# Altium PCB 180220.PcbDoc
Units mm, origin at the board's own origin, x right, y up, seen from the top; angles counter-clockwise.
Board outline 25.4 x 26.67 mm, 2 copper layers (Top Layer, Bottom Layer); 7 components, 5 nets, 18 pads, 0 vias.
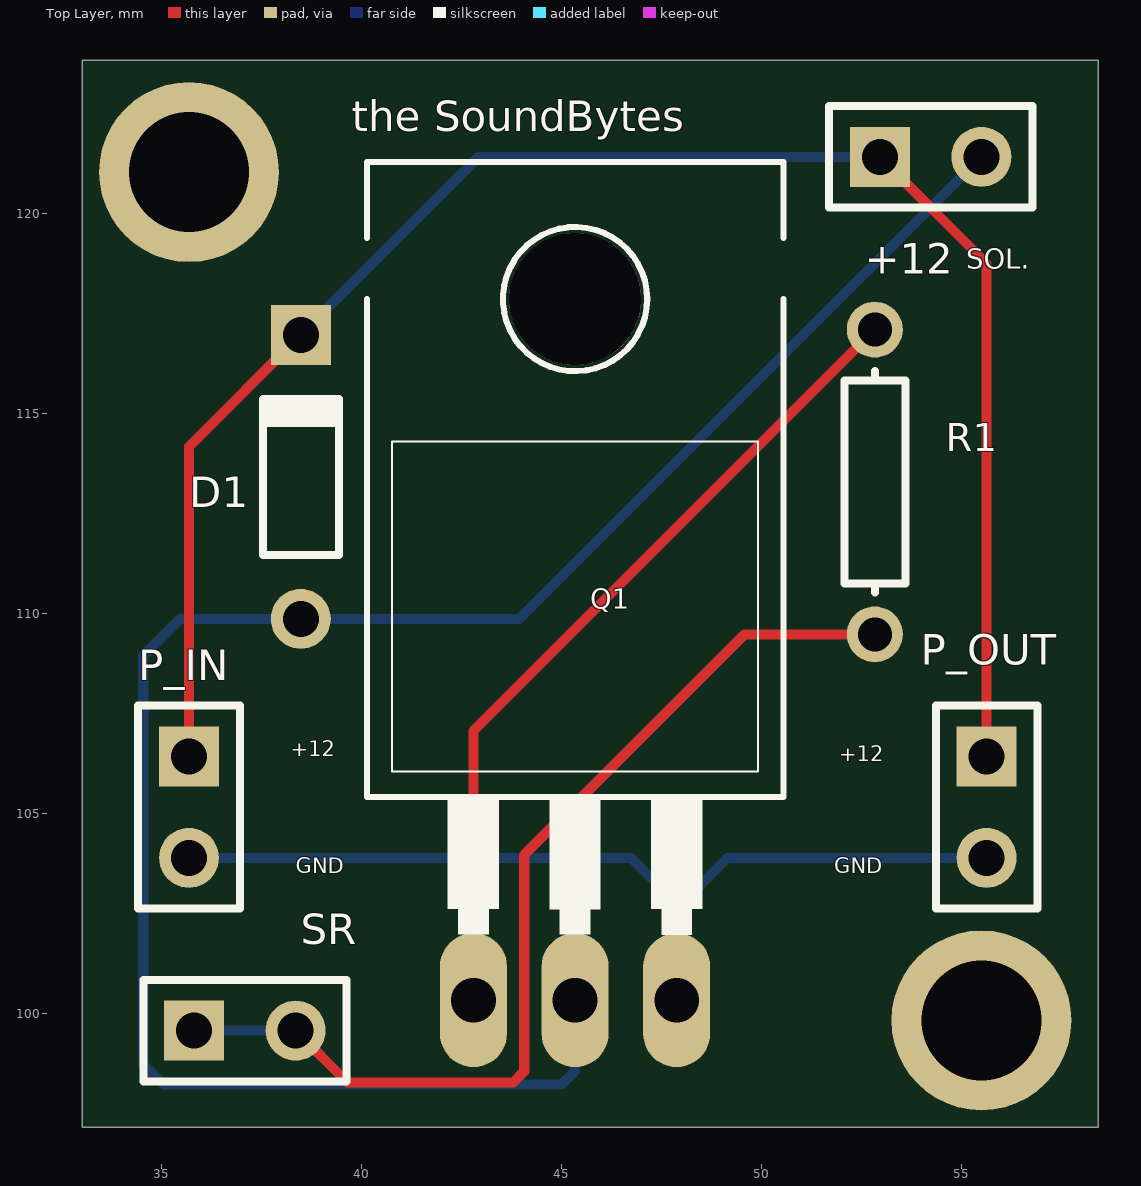
[diagram p0: Top Layer view]
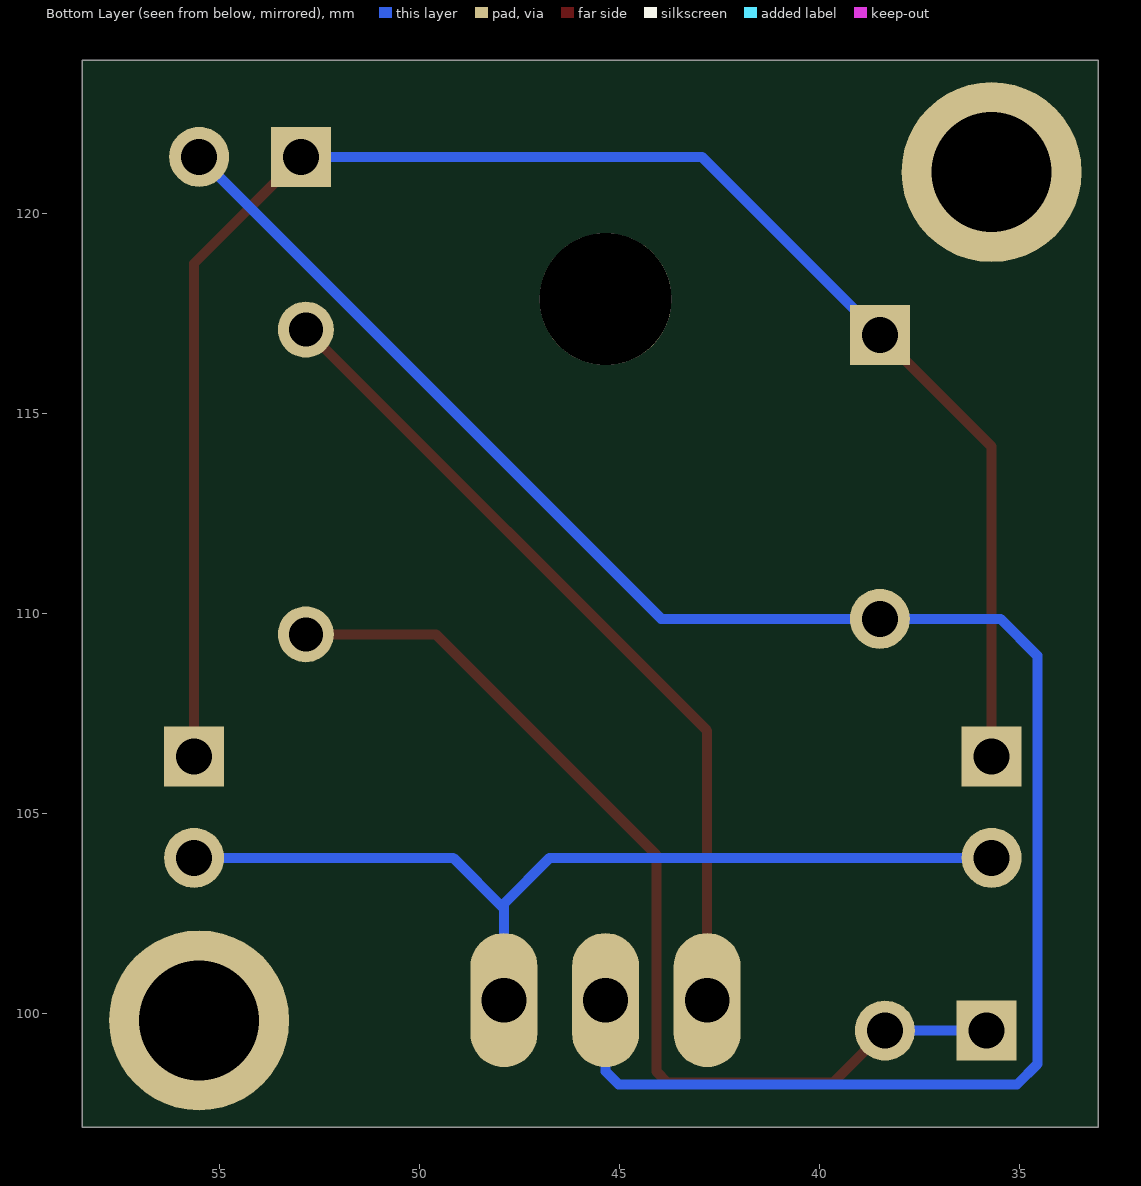
[diagram p1: Bottom Layer view, seen from below]

## Layer stack, top to bottom
Top Solder: solder mask 0.0102, Solder Resist, Dk 3.5
Top Layer: signal copper 0.0356
Dielectric 1: dielectric 0.32, FR-4, Dk 4.8
Bottom Layer: signal copper 0.0356
Bottom Solder: solder mask 0.0102, Solder Resist, Dk 3.5

## Board outline
33.02,123.825 58.42,123.825 58.42,97.155 33.02,97.155

## Design rules (kind name [scope] priority, off if disabled: settings)
Clearance [All] p1: gap=0.254
PolygonConnect [All] p1: connectstyle=Relief reliefconductorwidth=0.254 reliefentries=4 polygonreliefangle="90 Angle" airgapwidth=0.254
RoutingVias [All] p1: holewidth=0.711 width=1.27 viastyle="Through Hole" minholewidth=0.711 minwidth=1.27 maxholewidth=0.711 maxwidth=1.27
SolderMaskExpansion [All] p1: expansion=0.102
Width [All] p1: maxlimit=0.254 minlimit=0.254 preferedwidth=0.254
30 further rules are at their usual default settings.

## Components (designator, comment, footprint, x,y, rotation, side; value= is the part's Value field where it differs from the comment)
D1 "Diode 1N914" DO-35 38.481,113.411 r90 top
P_IN "P_IN" HDR1X2 35.687,106.426 r270 top (schematic designator P2)
P_OUT "P_OUT" HDR1X2 55.626,106.426 r270 top (schematic designator P4)
Q1 "TIP120" TO220AH_TIP120(Primary) 45.339,106.68 r0 top
R1 "Res1" AXIAL-0.3 52.832,113.284 r90 top
SOL. "Solenoid" HDR1X2 52.959,121.412 r0 top (schematic designator P1)
SR "SR" HDR1X2 35.814,99.568 r0 top (schematic designator P3)

## Footprints (in the part's own frame and the unit in brackets; to place one, negate y for a bottom-side part, rotate by r counter-clockwise, add the part's x,y. Pads: shape width x height; smd on the part's side, far side on the other; paste and mask are expansions set on the pad)
AXIAL-0.3 [mm] "Axial Device, Thru-Hole; 2 Leads; 0.3 in Pin Spacing"
  round 1.4 hole 0.85: 1(-3.81,0) 2(3.81,0)
  silkscreen extent -2.77,-0.76 2.77,0.76
DO-35 [mm] "Diode, Axial; Body 3.8 x 1.9 mm (LxDia. max), Lead Dia. 0.53 mm (max)"
  round 1.5 hole 0.9: 1(-3.55,0)
  rect 1.5x1.5 hole 0.9: 2(3.55,0)
  silkscreen extent -1.95,-0.95 2.05,0.95
HDR1X2 [mm] "Connector; Header; 2 Position"
  rect 1.5x1.5 hole 0.9: 1(0,0)
  round 1.5 hole 0.9: 2(2.54,0)
  silkscreen extent -1.27,-1.27 3.81,1.27
TO220AH_TIP120(Primary) [mil]
  oval 66x132 hole 44: B(-100,-250) C(0,-250) E(100,-250)
  round 130 hole 130 unplated: None(0,440)
  silkscreen extent -205,-186 205,575

## Part data
D1: "High Conductance Fast Diode"
P_IN P_OUT SOL. SR: library part "Header 2", "Header, 2-Pin"
Q1: "TRANS NPN DARL 60V 5A TO220AB"
R1: "Resistor"

## Free pads (board coordinates)
  round 4.5 hole 3: 0(35.687,121.031) 0(55.499,99.822)

## Nets (pads, with @x,y where several pads share a name; then routed paths per layer and width w, separated by ;. In a path a pad name is that pad's centre, name@x,y a point inside that pad or via, vN(x,y) a via of type N, cw(c..) or ccw(c..) an arc to the next point about the centre after c; other vN are vias at no path point)
+12: D1.2 P_IN.1 P_OUT.1 SOL..1 | length 44.1
  Top Layer w0.254: P_IN.1 35.687,114.167 D1.2 ; SOL..1 55.626,118.745 P_OUT.1
  Bottom Layer w0.254: D1.2 42.932,121.412 SOL..1
GND: P_IN.2 P_OUT.2 Q1.E | length 23.4
  Bottom Layer w0.254: P_IN.2 46.736,103.886 47.879,102.743 47.879,102.616 ; Q1.E 47.879,102.616 ; P_OUT.2 49.149,103.886 47.879,102.616
NetD1_1: D1.1 Q1.C SOL..2 | length 49.3
  Bottom Layer w0.254: Q1.C 45.339,98.552 45.009,98.222 35.052,98.222 34.544,98.73 34.544,108.941 35.464,109.861 D1.1 43.948,109.861 SOL..2
NetP3_1: R1.1 SR.1 SR.2 | length 25.4
  Top Layer w0.254: SR.2 39.649,98.273 43.79,98.273 44.069,98.552 44.069,103.962 49.581,109.474 R1.1
  Bottom Layer w0.254: SR.1 SR.2
NetQ1_B: Q1.B R1.2 | length 20.9
  Top Layer w0.254: Q1.B 42.799,107.061 R1.2
pads on no net: Q1.None

## Silkscreen, mask and mechanical layers (free items; w line width, h text height)
Top Overlay:
  text "the SoundBytes" at 39.751,122.047 h0.76
  text "+12" at 52.578,118.491 h0.76
  text "+12" at 38.227,106.426 h0.38
  text "+12" at 51.943,106.299 h0.38
  text "GND" at 38.354,103.505 h0.38
  text "GND" at 51.816,103.505 h0.38